# Altium PCB CH340E5T-R0.PcbDoc
Units mil, origin at the board's own origin, x right, y up, seen from the top; angles counter-clockwise.
Board outline 625.04 x 1132.27 mil, 2 copper layers (Top Layer, Bottom Layer); 14 components, 14 nets, 46 pads, 47 vias.
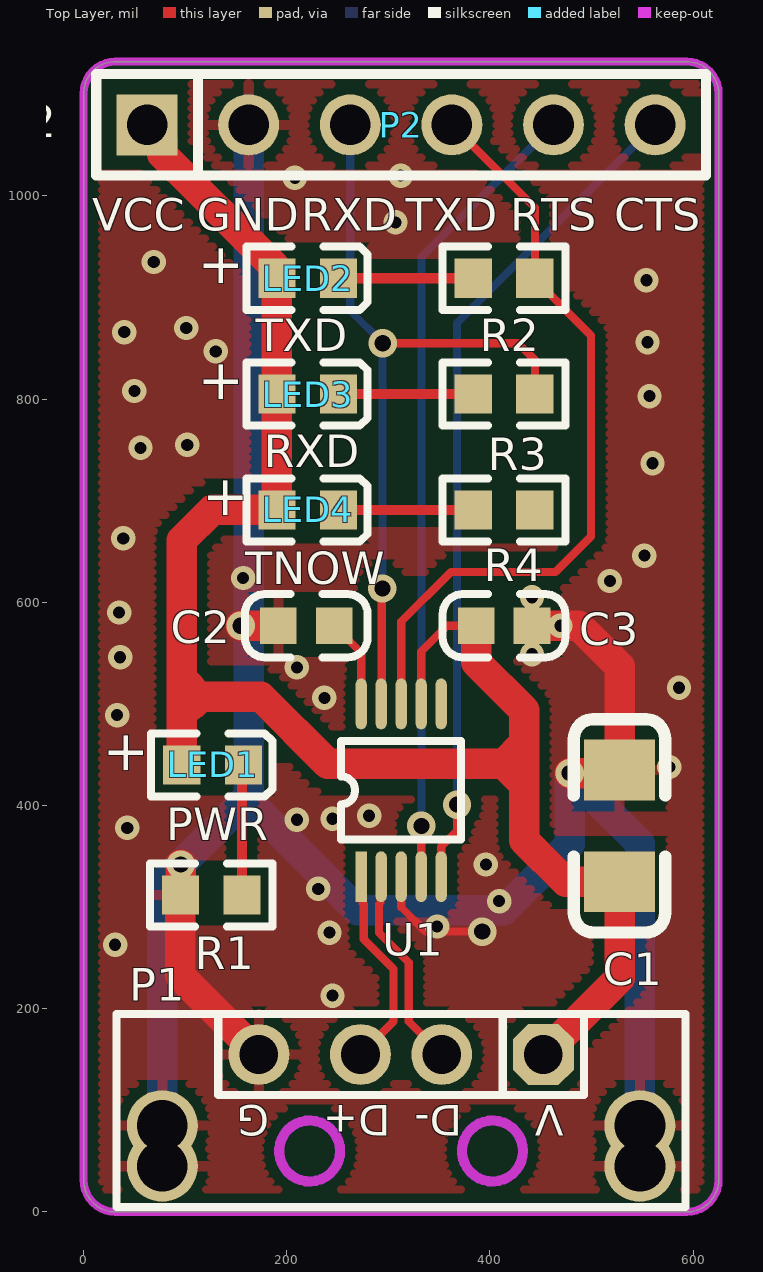
[diagram p0: Top Layer view]
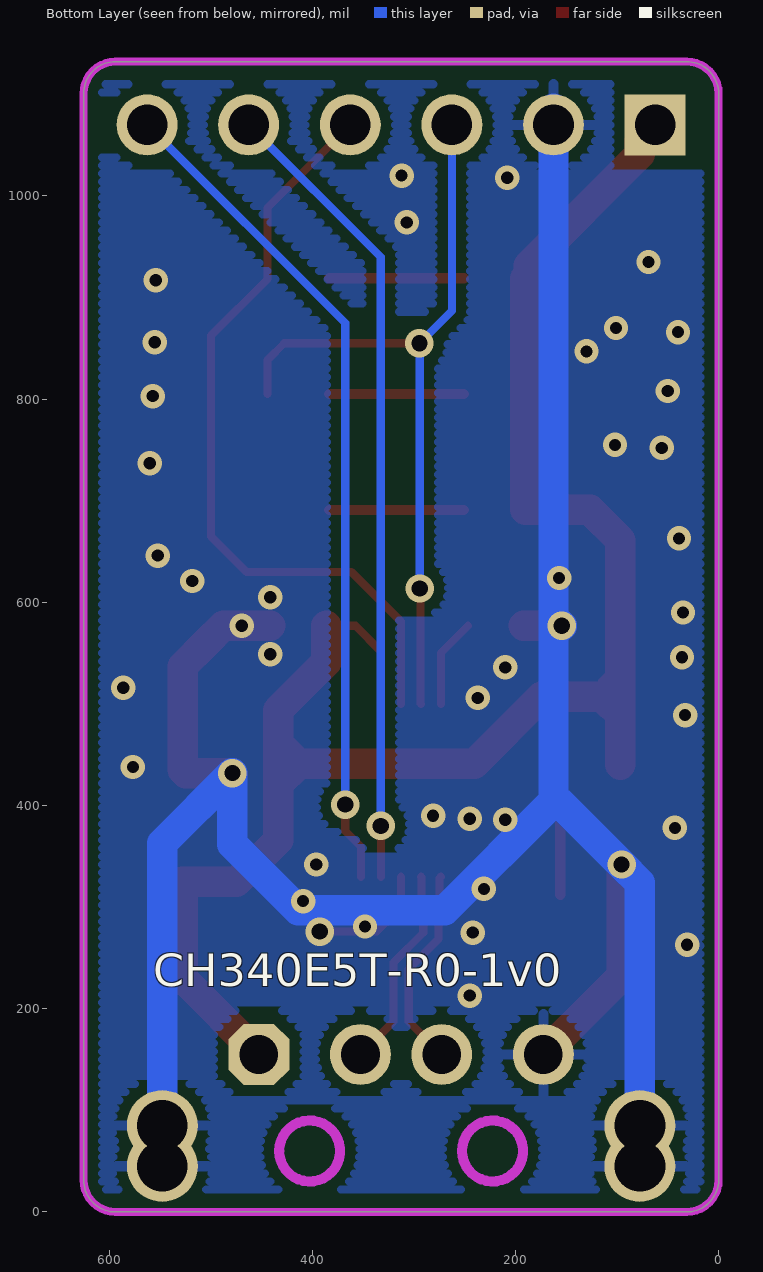
[diagram p1: Bottom Layer view, seen from below]

## Layer stack, top to bottom
Top Solder: solder mask 0.4, Solder Resist, Dk 3.5
Top Layer: signal copper 1.4
Dielectric 1: dielectric 12.6, FR-4, Dk 4.8
Bottom Layer: signal copper 1.4
Bottom Solder: solder mask 0.4, Solder Resist, Dk 3.5

## Board outline
0,31.5 0,1100.78 cw(c31.5,1100.78) 31.5,1132.27 593.54,1132.27 cw(c593.54,1100.78) 625.04,1100.78 625.04,31.5 cw(c593.54,31.5) 593.54,0 31.5,0 cw(c31.5,31.5)

## Design rules (kind name [scope] priority, off if disabled: settings)
Clearance Clearance_1 [InPolygon] p1: gap=10 ignorepadtopadclearanceinfootprint=FALSE
Clearance [All] p2: gap=6 ignorepadtopadclearanceinfootprint=FALSE
ComponentClearance [All] p1 off: gap=10 collisioncheckmode=3 verticalgap=10 showdistances=FALSE
DiffPairsRouting [All] p1: maxlimit=10 minlimit=7 mostfreqgap=8 toplayer_minwidth=6 toplayer_maxwidth=15 toplayer_prefwidth=8 bottomlayer_minwidth=6 bottomlayer_maxwidth=15 bottomlayer_prefwidth=8 maxuncoupledlength=500
MinimumSolderMaskSliver [All] p1 off: minsoldermaskwidth=10
PolygonConnect PolygonConnect_1 [IsVia] p1: connectstyle=Direct reliefconductorwidth=10 reliefentries=4 polygonreliefangle="90 Angle" airgapwidth=10
PolygonConnect [All] p2: connectstyle=Relief reliefconductorwidth=10 reliefentries=4 polygonreliefangle="90 Angle" airgapwidth=10
RoutingVias [All] p1: holewidth=16 width=28 viastyle="Through Hole" minholewidth=12 minwidth=24 maxholewidth=28 maxwidth=50
SilkToSilkClearance [All] p1 off: silktosilkclearance=10
SilkToSolderMaskClearance [IsPad] p1 off: minsilkscreentomaskgap=10 clearancetoexposedcopper=TRUE
SolderMaskExpansion [All] p1: expansion=4 istentingtop=FALSE
Width [All] p1: maxlimit=100 minlimit=6 preferedwidth=10
25 further rules are at their usual default settings.

## Classes and differential pairs
differential pair NewDifferentialPair1: +UD+ -UD-

## Components (designator, comment, footprint, x,y, rotation, side; value= is the part's Value field where it differs from the comment)
C1 "10uF" 3216_C 527.52,325 r270 top
C2 "0.1uF" 0603_C 246.7,577 r180 top
C3 "0.1uF" 0603_C 386.33,577 r0 top
LED1 "PWR" 0603+ 96.64,440 r0 top
LED2 "TXD" 0603+ 190.27,919 r0 top
LED3 "RXD" 0603+ 190.27,805 r0 top
LED4 "TNOW" 0603+ 190.27,691 r0 top
P1 "USB" USBAM 452.52,155 r180 top
P2 "Header 6H" SIP6-2.54mm 62.52,1070 r90 top
R1 "2K" 0603 155.9,312 r180 top
R2 "2K" 0603 383.51,919 r0 top
R3 "2K" 0603 383.51,805 r0 top
R4 "2K" 0603 383.51,691 r0 top
U1 "CH340E" MSOP10 273.26,330 r0 top

## Footprints (in the part's own frame and the unit in brackets; to place one, negate y for a bottom-side part, rotate by r counter-clockwise, add the part's x,y. Pads: shape width x height; smd on the part's side, far side on the other; paste and mask are expansions set on the pad)
0603 [mm]
  rect 0.93x0.98 smd: 1(0,0) 2(1.54,0)
  silkscreen extent -0.76,-0.79 2.3,0.79
0603+ [mm]
  rect 0.93x0.98 smd: 1(0,0) 2(1.54,0)
  silkscreen extent -0.76,-0.79 2.27,0.79
0603_C [mil]
  rect 36x36 smd: 1(0,0) 2(55,0)
  silkscreen extent -33,-31 88,31
3216_C [mil]
  rect 60x70 smd: 1(0,0) 2(-110,0)
  silkscreen extent -160,-45 50,45
MSOP10 [mil]
  rect 11x50 smd: 1(0,0)
  oval 11x50 smd: 2(19.69,0) 3(39.37,0) 4(59.06,0) 5(78.74,0) 6(78.74,170) 7(59.06,170) 8(39.37,170) 9(19.69,170) 10(0,170)
  silkscreen extent -20,37 98,133
SIP6-2.54mm [mil]
  rect 60x60 hole 40: 1(0,0)
  round 60 hole 40: 2(0,-100) 3(0,-200) 4(0,-300) 5(0,-400) 6(0,-500)
  silkscreen extent -50,-550 50,50
USBAM [mil]
  round 70 hole 50: 0(-95,70) 0(-95,110) 0(375,70) 0(375,110)
  oct 60x60 hole 38: 1(0,0)
  round 60 hole 38: 2(100,0) 3(180,0) 4(280,0)
  Keep-Out Layer circle w10: c50,95 r30
  Keep-Out Layer circle w10: c230,95 r30
  silkscreen extent -140,-40 420,150

## Part data
C1 C2 C3: library part CAP, "Capacitor"
LED1 LED2 LED3 LED4: library part LED2, "Typical RED, GREEN, YELLOW, AMBER GaAs LED"
P2: "Header, 6-Pin, Right Angle", LatestRevisionDate=17-Jul-2002, LatestRevisionNote="Re-released for DXP Platform.", Publisher="Altium Limited"
R1 R2 R3 R4: library part Res2, "Resistor"
U1: "USB to TTL Serial / UART"

## Via types
v1: diameter 24, hole 12, Top Layer to Bottom Layer, 39 vias
v2: diameter 28, hole 16, Top Layer to Bottom Layer, 8 vias

## Nets (pads, with @x,y where several pads share a name; then routed paths per layer and width w, separated by ;. In a path a pad name is that pad's centre, name@x,y a point inside that pad or via, vN(x,y) a via of type N, cw(c..) or ccw(c..) an arc to the next point about the centre after c; other vN are vias at no path point)
CTS: P2.6 U1.5 | length 827.2
  Top Layer w8: U1.5 352,359.48 367.52,375 v2(367.52,401)
  Bottom Layer w8: v2(367.52,401) 367.52,875 P2.6
GND: C1.2 C2.2 C3.2 P1.0 P1.4 P2.2 R1.2 U1.3 | length 2624.1
  Top Layer w8: U1.3 312.63,299.89 336.52,276 v2(392.52,276)
  Top Layer w30: v2(95.52,342) 95.52,312.25 R1.2 95.27,232.25 P1.4 ; v2(154.52,577) C2.2 ; C3.2 487.52,577 504.51,560.01 527.52,537 C1.2 524.52,432 v2(478.52,432)
  Bottom Layer w8: v2(392.52,276) v1@413.52,297
  Bottom Layer w30: P1.0@77.52,45 77.52,85 77.52,324 v2(95.52,342) 157.52,404 162.52,404 ; v2(154.52,577) v2@162.52,585 ; P2.2@162.52,1086 P2.2 v2@162.52,585 ; P1.0@547.52,45 547.52,85 547.52,363 v2(478.52,432) 478.52,362 413.52,297 269.52,297 162.52,404 ; 162.52,404 v2@162.52,585
  other v1: 245,213 31,263 242,275 348,281 409,306 231,318 396,342 43,378 210,386 245,387 281,390 576.52,438 33,489 237,506 586,516 210,536 36,546 441.33,549 469.33,577 35,590 441.33,605 518,621 157,624 552,646 39,663 560,737 56,752 102,755 557,803 50,808 130,847 555,856 40,866 101,870 554,917 69,935 307,974 208,1018 312.02,1020
NetC2_1: C2.1 U1.10 | length 88
  Top Layer w8: C2.1 273.26,550.44 U1.10
NetLED1_2: LED1.2 R1.1 | length 128.6
  Top Layer w10: R1.1 155.9,438.62 LED1.2
NetLED2_2: LED2.2 R2.1 | length 132.6
  Top Layer w10: LED2.2 R2.1
NetLED3_2: LED3.2 R3.1 | length 132.6
  Top Layer w10: LED3.2 R3.1
NetLED4_2: LED4.2 R4.1 | length 132.6
  Top Layer w10: LED4.2 R4.1
RTS: P2.5 U1.4 | length 793.9
  Top Layer w8: U1.4 332.31,379.8 v2(332.52,380)
  Bottom Layer w8: v2(332.52,380) 332.52,940 P2.5
RXD: P2.3 R3.2 U1.9 | length 769.3
  Top Layer w8: U1.9 293.52,500.57 293.52,613 v2(294.14,613.62) ; v2(294.52,855) 427.52,855 444.14,838.38 R3.2
  Bottom Layer w8: P2.3 262.52,887 v2(294.52,855) ; v2(294.14,613.62) 294.14,846.62 v2@297.02,849.5
TNOW: R4.2
TXD: P2.4 R2.2 U1.8 | length 764.5
  Top Layer w8: U1.8 312.63,581.11 361.52,630 464.52,630 499.52,665 499.52,862.64 444.14,918.02 R2.2 444.14,988.38 P2.4
UD+: P1.3 U1.1 | length 201.6
  Top Layer w8: P1.3 305.02,187.5 305.02,239.29 275.7,268.6 275.7,302.99 274.76,303.94 274.76,328.5 U1.1
UD-: P1.2 U1.2 | length 201.5
  Top Layer w8: U1.2 292.37,329.43 292.37,304.55 290.7,302.88 290.7,274.82 320.02,245.5 320.02,187.5 P1.2
VCC: C1.1 C3.1 LED1.1 LED2.1 LED3.1 LED4.1 P1.1 P2.1 U1.7 | length 1864.1
  Top Layer w8: U1.7 332.31,551.8 357.52,577 C3.1
  Top Layer w30: P2.1 77.52,1055 77.52,1041 186.96,931.56 186.96,922.31 LED2.1 LED3.1 LED4.1 126.52,691 96.64,661.13 96.64,525 ; LED1.1 96.64,507 ; 105.64,498 114.64,507 ; 105.64,516 96.64,525 ; C3.1 386.33,541.19 433.52,494 433.52,461 ; P1.1 527.52,230 C1.1 474.52,325 433.52,366 433.52,421 ; 96.64,507 96.64,525 ; 96.64,507 114.64,507 ; 114.64,507 174.52,507 240.52,441 413.52,441 ; 413.52,441 433.52,461 ; 413.52,441 433.52,421 ; 413.52,441 433.52,441 ; 433.52,421 433.52,441 ; 433.52,441 433.52,461
pads on no net: U1.6

## Polygon pours and split planes (outlines as drawn)
GND on Bottom Layer "GND_L" (hatched Horizontal grid 8 track 8, remove dead copper, pour order 1): 0,1134 0,1 629,1 629,1130
GND on Top Layer "GND_L" (hatched Horizontal grid 8 track 8, remove dead copper, pour order 0): 0,1134 0,1 629,1 629,1130

## Keep-outs
Keep-Out Layer:
  the board outline again, w8

## Silkscreen, mask and mechanical layers (free items; w line width, h text height)
Top Overlay:
  text "VCC" at 8.52,966 h32
  text "GND" at 111.32,966 h32
  text "RXD" at 214.12,966 h32
  text "TXD" at 316.92,966 h32
  text "RTS" at 419.72,966 h32
  text "CTS" at 522.52,966 h32
Bottom Overlay:
  text "CH340E5T-R0-1v0" at 556.52,222 h32
Mechanical 1:
  the board outline again, w8

## Text inside footprints (layer, text, board x,y; h text height)
LED1: Top Overlay "+" at 58.57,429.01 h40 r90
LED2: Top Overlay "+" at 152.19,908.01 h40 r90
LED3: Top Overlay "+" at 152.19,794.01 h40 r90
LED4: Top Overlay "+" at 156.52,680 h40 r90
P1: Top Overlay "D-" at 372.52,105 h30 r180; Top Overlay "D+" at 302.52,105 h30 r180; Top Overlay "V" at 472.52,105 h30 r180; Top Overlay "G" at 182.52,105 h30 r180